# Altium PCB GY-G11.PCBDOC (part 4 of 7)
Units mm, origin at the board's own origin, x right, y up, seen from the top; angles counter-clockwise.
Board outline 170.4 x 114.15 mm, 2 copper layers (Top Layer, Bottom Layer); 364 components, 260 nets, 1285 pads, 753 vias.
Unrouted connection lines stored in the file: 2.
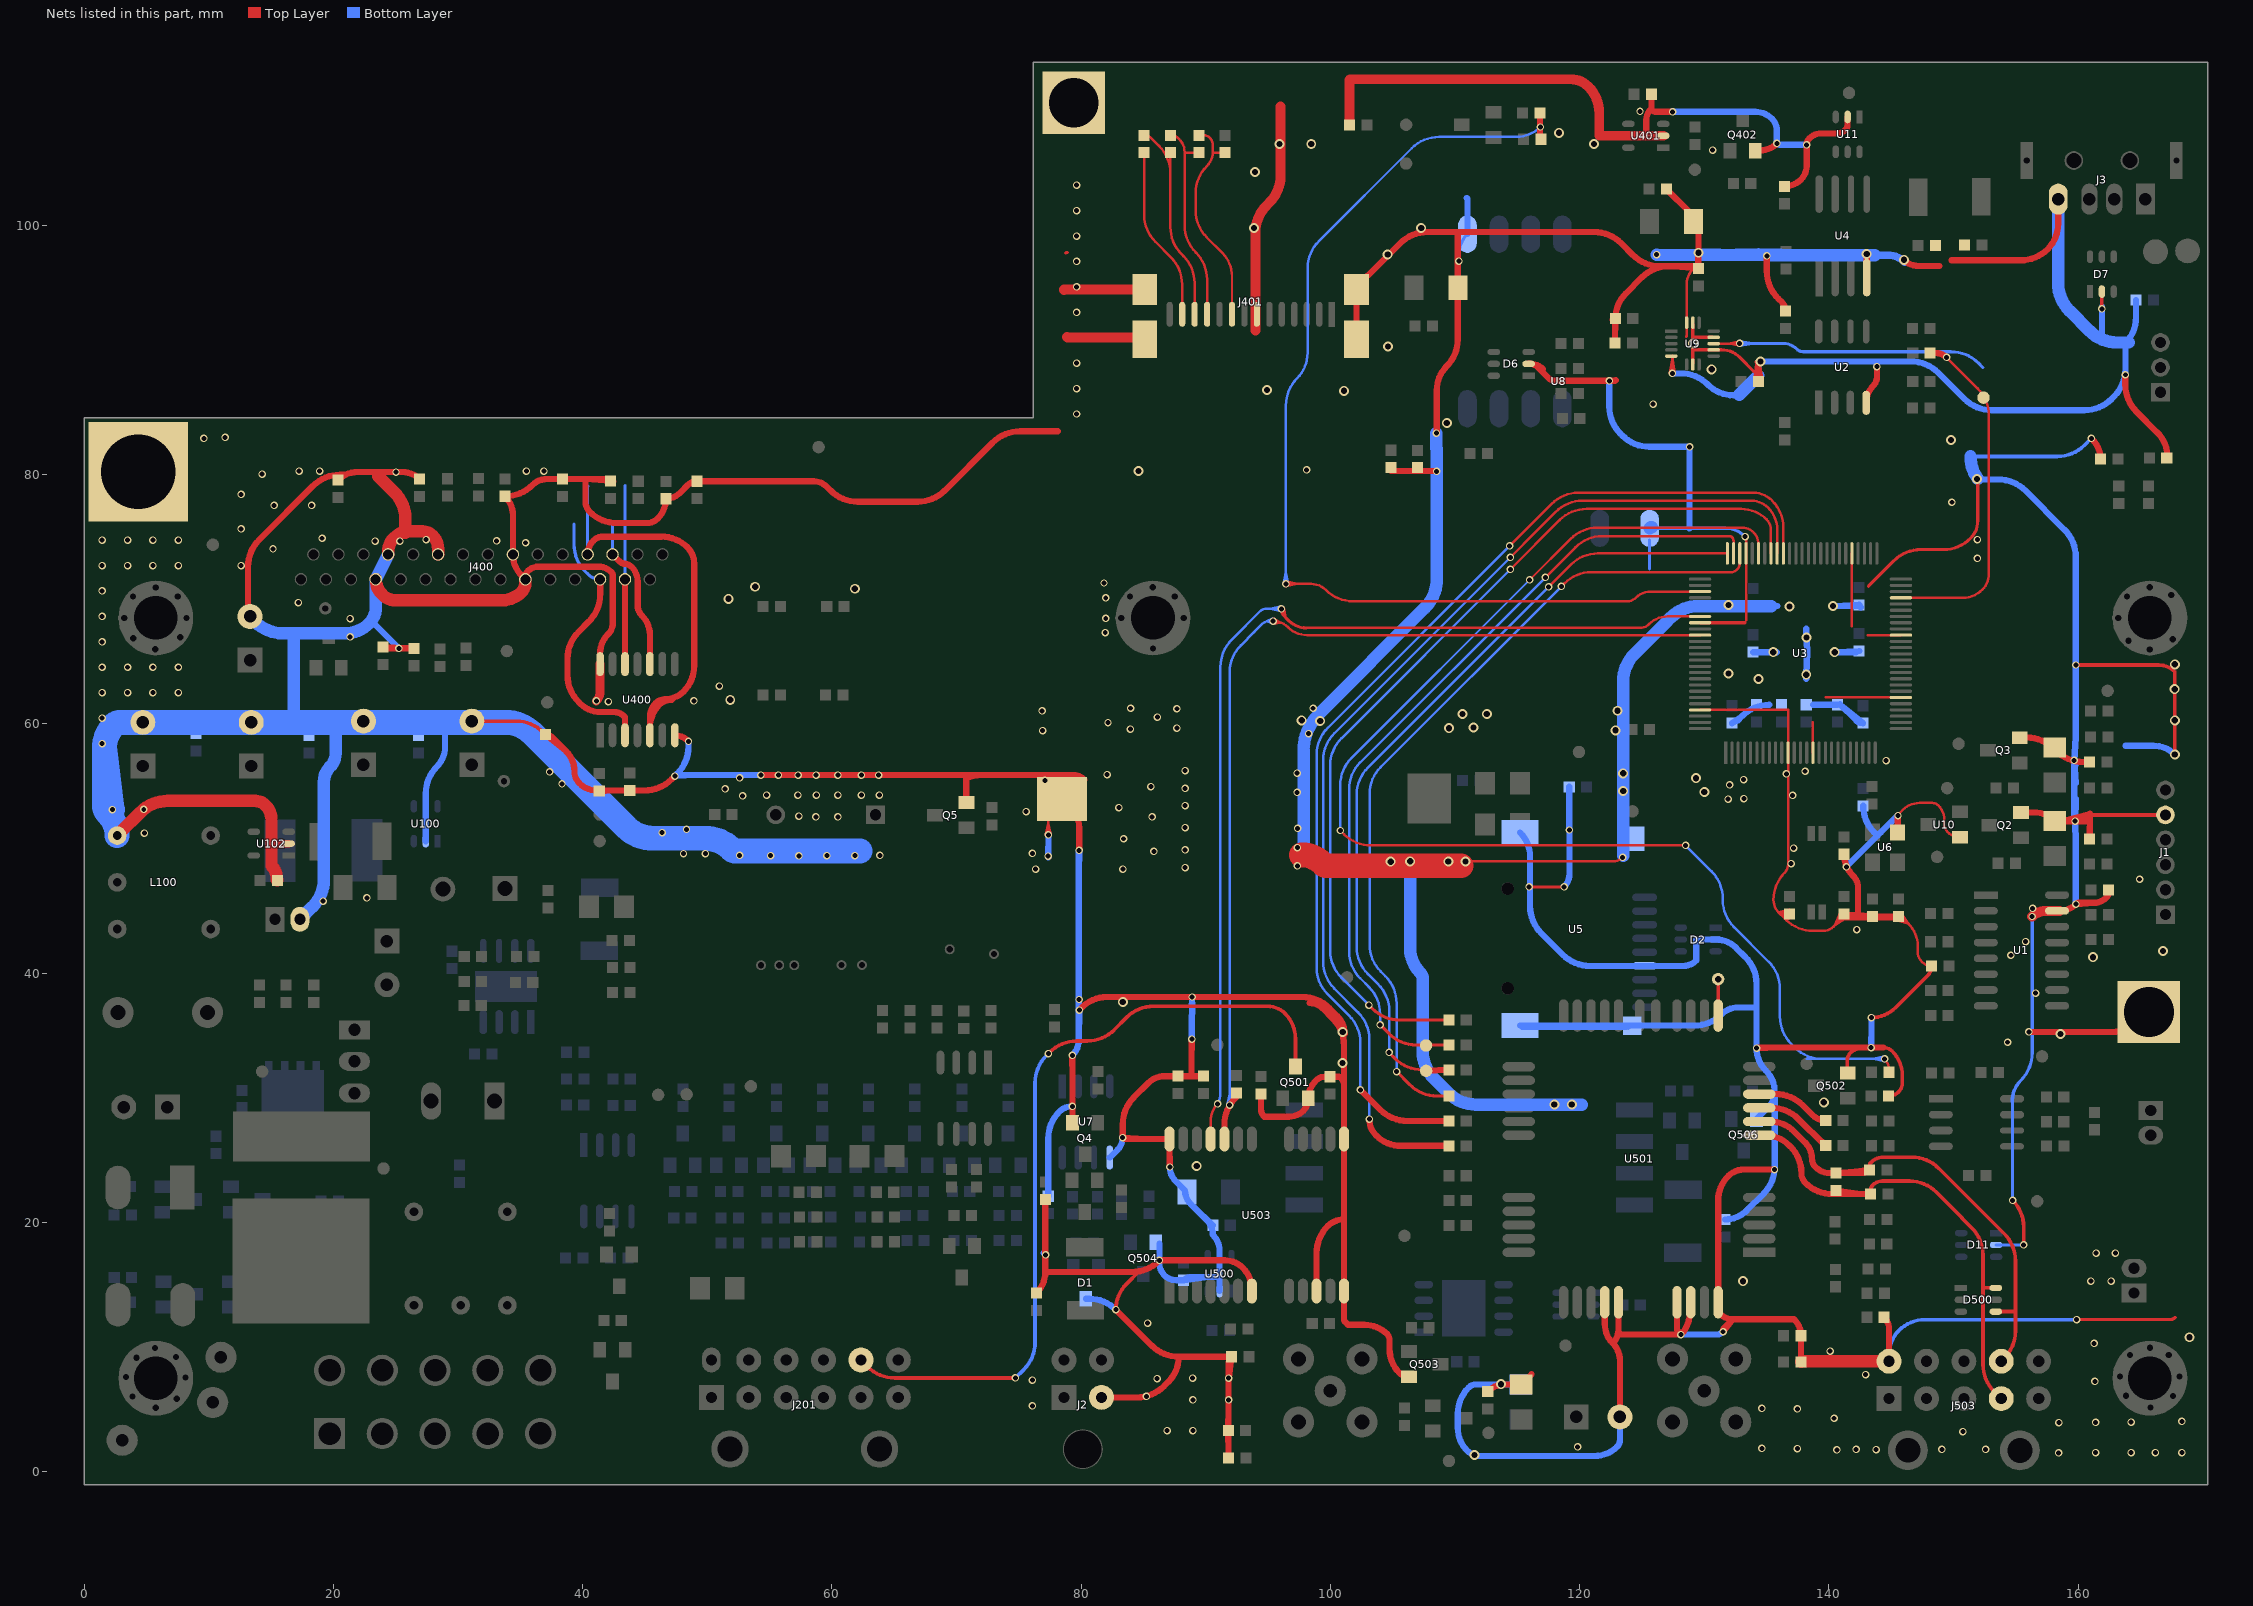
[diagram p4: the nets of this part, all layers, seen from the top]

## Via types
v1: diameter 0.6, hole 0.4, Top Layer to Bottom Layer, 620 vias
v2: diameter 0.8, hole 0.5, Top Layer to Bottom Layer, 121 vias
v3: diameter 1, hole 0.5, Top Layer to Bottom Layer, 10 vias
v4: diameter 1.27, hole 0.711, Top Layer to Bottom Layer, 2 vias

## Nets (pads, with @x,y where several pads share a name; then routed paths per layer and width w, separated by ;. In a path a pad name is that pad's centre, name@x,y a point inside that pad or via, vN(x,y) a via of type N, cw(c..) or ccw(c..) an arc to the next point about the centre after c; other vN are vias at no path point) (continued)
GND: BQ100.2 BT1.2 C3.2 C5.2 C6.1 C7.2 C8.2 C9.2 C10.2 C11.2 C12.1 C13.2 C14.2 C15.2 C16.2 C17.2 C18.2 C19.2 C20.2 C21.2 C22.2 C23.2 C24.2 C25.2 C26.2 C27.1 C28.1 C29.2 C30.1 C31.2 C32.2 C33.2 C107.2 C108.2 C114.2 C115.1 C118.2 C122.2 C124.2 C400.2 C401.1 C402.1 C403.1 C404.2 C405.2 C406.1 C407.1 C408.1 C409.1 C410.1 C411.1 C412.1 C413.2 C417.2 C418.2 C500.2 C501.2 C502.2 C503.2 C504.2 C505.2 C506.1 C507.2 C524.2 D1.3 D2.2 D4.1 D5.1 D6.2 D7.2 D11.2 D503.1 D504.1 J1.5 J2.3 J3.4 J400.12 J400.13 J400.19 J400.23 J400.24 J401.0 J401.7 J503.2 L7.2 L100.4 L500.2 L501.2 L502.2 L503.2 L504.1 pad.0@4.339,80.24 pad.0@79.4,109.84 pad.0@85.101,90.87 pad.0@102.101,90.87 pad.0@165.67,36.89 Q2.2 Q3.2 Q4.2 Q5.2 Q402.2 Q501.2 Q502.2 Q503.2 Q504.2 Q506.2 R4.1 R5.1 R22.2 R23.2 R28.2 R102.2 R400.1 R411.2 R412.2 R501.1 R503.1 R522.1 U1.15 U2.4 U3.11 U3.15 U3.31 U3.41 U3.55 U3.72 U3.83 U3.97 U4.4 U5.6 U5.10 U6.2 U7.5 U8.8 U8.10 U9.5 U9.7 U9.10 U9.12 U9.15 U9.16 U10.1 U11.2 U100.2 U102.2 U400.7 U400.14 U401.2 U500.2 U501.35 U501.36 U501.37 U501.38 U501.40 U503.7 U503.10 U503.12 U503.13 U503.24 | length 1703.7
  Top Layer w0.2: v1@77.171,51.122 77.37,52 v1@77.569,51.122 ; v1(77.37,51.1) 77.37,52.392 cw(c77.848,52.392) BT1.2@77.51,52.73 ; 97.5,49.49 98.723,49.49 cw(c98.723,47.373) 100.22,48.87 cw(c100.461,48.629) 100.461,48.97 122.677,48.97 ccw(c122.677,50.063) v1(123.45,49.29) ; 128.55,91.08 ccw(c128.496,91.134) 128.572,91.134 128.572,95.273 cw(c130.237,95.273) 129.06,96.45 cw(c129.274,96.236) C17.2@129.274,96.539 ; U3.97@129.656,61.124 136.716,61.124 136.716,48.704 cw(c135.802,48.704) 136.448,48.058 ccw(c138.616,45.89) 135.55,45.89 ccw(c136.974,45.89) 135.967,44.883 ; v1(133.273,75.039) cw(c133.096,74.862) 133.346,74.862 133.346,68.331 ; C28.1@136.465,44.385 135.967,44.883 ; C28.1@136.484,44.805 136.562,44.288 ; C28.1@136.688,44.796 136.562,44.288 ; C28.1@136.7,44.42 135.967,44.883 ; C28.1@136.787,44.602 135.967,44.883 ; C28.1@136.81,45.086 135.967,44.883 ; C28.1@136.834,44.886 135.967,44.883 ; C28.1@136.937,44.653 136.562,44.288 ; C28.1@137.048,44.481 136.562,44.288 ; U3.15@138.716,57.694 138.716,60.146 ; 139.738,62.124 U3.31@145.776,62.124 ; C27.1@140.929,44.922 140.458,43.828 ; C27.1@141.106,44.828 140.458,43.828 ; C27.1@141.327,44.642 140.458,43.828 ; C27.1@141.452,44.485 140.458,43.828 ; 141.846,67.844 U3.55@141.846,73.684 ; 142.32,44.561 C114.2@143.478,44.561 ; 143.117,67.124 U3.41@145.776,67.124 ; C114.2@143.421,44.222 142.433,44.561 ; C114.2@143.421,44.901 142.433,44.561 ; C114.2@143.468,44.417 142.433,44.561 ; C114.2@143.468,44.705 142.433,44.561 ; C29.2@145.423,44.254 146.39,43.96 ; C29.2@145.5,44.439 146.39,43.96 ; v1(145.54,52.64) cw(c145.736,52.64) 145.597,52.779 145.919,53.1 cw(c147.271,51.748) 147.271,53.66 148.296,53.66 cw(c148.296,52.977) 148.779,53.46 cw(c147.62,52.301) 149.259,52.301 149.259,51.975 ccw(c150.188,51.975) 149.531,51.318 ccw(c150.503,52.29) U10.1@150.503,50.915 ; C29.2@145.672,44.671 146.39,43.96 ; C29.2@145.827,44.799 146.39,43.96 ; C6.1@148.242,40.578 cw(c148.242,41.662) 147.475,40.895 cw(c148.331,41.752) 147.12,41.752 147.12,42.198 ccw(c144.628,42.198) 146.39,43.96 ; 135.967,44.883 C28.1@136.822,44.742 136.562,44.288 ; 136.562,44.288 ccw(c138.73,46.456) 138.73,43.39 139.525,43.39 ccw(c139.525,44.585) 140.37,43.74 141.117,44.487 ccw(c140.862,44.742) 141.174,44.561 ccw(c140.862,44.742) C27.1@141.222,44.742 140.458,43.828 ; 146.39,43.96 C29.2@145.578,44.561 cw(c145.578,44.052) 145.938,44.412 146.39,43.96
  Top Layer w0.254: v1@48.423,58.667 v1(48.49,58.6) ; 78.75,97.78 cw(c78.895,97.635) 78.895,97.84 ; v1(115.95,46.93) v1(118.75,46.93) ; v1@127.268,88.146 127.45,89.192 ; v1(127.44,88.13) 127.45,89.192 ; v1@127.45,88.154 U9.5@127.45,89.517 ; v1@127.613,88.142 127.45,89.192 ; U9.7@129.072,88.951 129.072,90.02 ; 129.072,90.03 U9.15@129.072,92.1 ; 129.072,91.05 ccw(c129.13,91.108) 129.13,91.026 U9.12@130.648,91.026 ; 129.082,90.026 131.377,90.026 cw(c131.377,87.957) 132.84,89.42 134.025,88.235 cw(c133.267,87.478) C15.2@134.339,87.478 ; U3.83@129.656,68.124 133.26,68.124 ; C15.2@134.021,87.481 v2@134.196,88.895 ; C15.2@134.024,87.519 134.339,88.684 C15.2@134.653,87.519 ; C15.2@134.029,87.547 v2@134.448,88.695 ; v2@134.166,89.076 134.339,88.028 ; v2(134.511,89.076) 134.339,88.028 ; C15.2@134.649,87.544 v2@134.196,88.895 ; C15.2@134.656,87.49 v2@134.448,88.695 ; 143.162,71.042 145.212,73.092 cw(c147.38,70.924) 147.38,73.99 149.19,73.99 ccw(c149.19,77.056) 151.358,74.888 ccw(c149.953,76.293) 151.94,76.293 v2@151.94,79.66 ; v1(159.88,12.2) 167.34,12.2 ccw(c167.34,12.828) 167.784,12.384 ; v2@134.196,88.895 C15.2@134.339,87.478 ; C15.2@134.339,87.478 134.339,88.028 ; C15.2@134.339,87.478 v2@134.448,88.695 ; C15.2@134.339,87.478 134.339,88.028 ; 134.339,88.028 134.643,87.569 134.339,88.028 ; 134.339,88.028 134.035,87.569 134.339,88.028
  Top Layer w0.3: C124.2@31.108,60.226 34.665,60.226 cw(c34.665,57.16) 36.833,59.328 C7.2@37.022,59.139 ; v1(82.78,13) cw(c85.701,13) 83.636,15.066 84.653,16.083 ; v1(134.19,33.98) cw(c134.311,33.859) v1@134.311,34.03 ; Q502.2@141.476,32.004 141.476,33.039 cw(c142.241,33.039) 141.7,33.58 cw(c142.786,32.494) 142.786,34.03 ; v1(143.41,36.44) ccw(c143.41,39.192) 145.356,37.246 147.926,39.816 ccw(c147.165,40.578) C6.1@148.242,40.578 ; 144.38,34.03 cw(c144.38,33.04) 145.08,33.74 cw(c143.124,31.784) 145.89,31.784 145.89,31.215 cw(c144.84,31.215) 145.583,30.473 cw(c144.794,31.261) R503.1@144.794,30.146 ; v1(154.74,21.78) cw(c152.591,19.631) 155.63,19.631 v1(155.63,18.21) ; v1(159.809,64.73) 166.436,64.73 cw(c166.436,62.886) 167.74,64.19 cw(c167.716,64.166) 167.75,64.166 v2(167.75,57.539) ; 160.937,52.699 166.998,52.699 ccw(c166.998,52.702) J1.5@167,52.7 ; v1(161.896,93.31) D7.2@161.896,94.694
  Top Layer w0.5: C400.2@13.15,68.4 13.15,72.62 cw(c16.216,72.62) 14.048,74.788 18.362,79.102 cw(c20.53,76.934) 20.53,80 C401.1@20.81,80 ; C401.1@20.374,79.567 cw(c21.926,78.015) 21.926,80.21 25.571,80.21 cw(c25.571,78.343) R411.2@26.892,79.663 ; 25.934,66.067 C412.1@23.978,66.158 ; C409.1@26.474,66.067 C412.1@24.198,66.067 ; 38.656,57.824 C7.2@37.022,59.139 ; 40.22,79.658 40.22,77.868 ccw(c41.422,77.868) 40.572,77.018 ccw(c42.74,79.186) 42.74,76.12 45.163,76.12 ccw(c45.163,77.319) 46.011,76.471 ccw(c44.412,78.07) C405.2@46.674,78.07 ccw(c46.674,79.679) 47.811,78.541 48.451,79.181 cw(c49.158,78.474) R400.1@49.158,79.474 58.546,79.474 cw(c58.546,78.026) 59.57,79.05 59.892,78.728 ccw(c62.06,80.896) 62.06,77.83 66.88,77.83 ccw(c66.88,80.896) 69.048,78.728 72.884,82.564 cw(c75.095,80.353) 75.095,83.48 78.12,83.48 ; 40.252,79.658 R412.2@42.246,79.503 ; C402.1@41.326,54.633 43.271,54.661 C108.2@43.778,54.661 41.833,54.64 ; U400.14@41.394,64.808 41.394,65.641 cw(c43.599,65.641) 42.04,67.2 ccw(c41.123,68.117) 42.42,68.117 42.42,71.9 ccw(c42.01,71.9) 42.3,72.19 ccw(c41.262,71.152) 41.262,72.62 36.459,72.62 ccw(c36.459,71.391) 35.59,72.26 ccw(c36.049,71.801) 35.4,71.801 35.4,71.6 35.107,71.893 cw(c36.814,73.6) 34.4,73.6 34.4,76.758 ccw(c32.261,76.758) C404.2@33.774,78.27 33.8,78.27 ccw(c33.8,81.336) 35.968,79.168 cw(c37.152,77.985) 37.152,79.658 41.981,79.658 cw(c41.981,78.981) 42.46,79.46 ccw(c42.356,79.356) R412.2@42.356,79.503 ; v1(47.39,55.82) 47.129,55.559 cw(c44.961,57.727) 44.961,54.661 41.119,54.661 cw(c41.119,56.617) 39.736,55.234 cw(c40.692,56.19) 39.34,56.19 ccw(c37.046,56.19) 38.668,57.812 37.567,58.913 ; U400.7@47.394,59.093 cw(c47.394,57.637) v1@48.423,58.667 ; v1(54.3,55.9) 79.357,55.9 cw(c79.357,54.637) BT1.2@80.25,55.53 ; Q5.2@70.776,53.704 70.776,55.662 cw(c71.96,52.834) 71.96,55.9 ; C10.2@76.422,14.339 ccw(c74.732,16.029) 77.122,16.029 ; 77.122,19.2 v1(77.14,17.4) 77.122,16.029 ; C411.1@77.122,21.842 77.122,16.029 ; BT1.2@79.2,53.24 cw(c77.655,51.695) 79.84,51.695 v1(79.84,49.86) ; v1(79.29,33.4) 79.296,31.6 ; Q4.2@79.296,27.976 v1@79.296,33.4 ; v1(79.846,37.038) 80.09,37.282 ; 80.087,37.279 cw(c82.032,35.332) 80.43,37.57 cw(c82.032,35.332) 82.032,38.085 ; J2.3@81.627,5.964 84.474,5.964 ccw(c84.474,9.03) 86.642,6.862 86.997,7.217 ccw(c84.991,9.222) 87.828,9.222 ; 81.825,38.09 97.75,38.09 cw(c97.75,35.024) 99.918,37.192 100.553,36.557 cw(c99.136,35.14) v2@101.14,35.14 ; v1(82.78,13) 85.66,10.12 ccw(c87.828,12.288) 87.828,9.222 ; 85.148,26.694 v1(83.33,26.81) ; U503.24@87.09,26.251 v1(87.11,24.45) cw(c87.158,24.498) 87.09,24.498 U503.24@87.09,26.694 83.609,26.694 cw(c83.609,27.089) v1(83.33,26.81) ; 88.86,31.739 v1@88.86,34.662 ; 88.86,32.909 v1(88.88,34.71) ; C501.2@89.722,31.739 C506.1@87.778,31.758 86.705,31.739 ; C501.2@89.822,31.739 86.705,31.739 ; L502.2@91.823,1.101 91.823,8.647 ; L502.2@91.823,1.355 L503.2@91.803,3.3 91.823,5.245 ; v1@91.823,7.224 C502.2@92.061,9.222 ; U503.7@93.69,14.494 93.69,14.608 ccw(c91.198,14.608) 92.96,16.37 ccw(c91.536,14.946) 91.536,16.96 v1(86.28,16.96) 86.247,16.927 cw(c84.079,19.095) 84.653,16.083 cw(c84.079,19.095) 84.079,16.029 77.122,16.029 ; R501.1@94.436,30.322 94.436,29.065 ccw(c95.235,29.065) 94.67,28.5 ccw(c94.694,28.524) 94.694,28.49 96.671,28.49 ccw(c96.671,30.129) 97.83,28.97 ccw(c96.922,29.878) 98.206,29.878 cw(c100.35,29.878) 98.834,31.394 cw(c99.558,30.67) 99.558,31.694 100.613,31.694 ; 98.319,37.61 cw(c98.319,36.113) 99.377,37.172 100.192,36.357 cw(c98.024,34.189) 101.09,34.189 101.09,12.232 ccw(c101.386,12.232) 101.177,12.022 101.41,11.789 102.74,11.789 cw(c102.74,9.232) 104.549,11.04 cw(c104.09,10.581) 104.739,10.581 104.739,9.49 ; U503.10@98.89,14.494 98.89,17.55 cw(c101.956,17.55) 99.788,19.718 cw(c101.048,18.458) 101.048,20.24 101.09,20.24 ; R522.1@99.954,31.694 100.613,31.694 ; 101.09,30.996 ccw(c100.236,30.996) 100.84,31.6 ccw(c100.613,31.373) 100.613,31.694 ; pad.0@102.101,90.87 102.101,93.81 cw(c105.167,93.81) 102.999,95.978 104.634,97.614 105.593,98.572 cw(c107.761,96.404) 107.761,99.47 121.16,99.47 cw(c121.16,96.404) 123.328,98.572 124.272,97.628 ccw(c126.44,99.796) 126.44,96.73 129.522,96.73 129.45,97.94 C17.2@129.522,96.539 ; 104.74,9.85 ccw(c107.468,9.85) 105.539,7.921 ccw(c106.324,8.706) Q503.2@106.324,7.596 ; C31.2@104.874,80.289 v1@108.474,80.289 ; v1(108.501,83.33) ccw(c108.428,83.403) 108.531,83.403 108.531,86.783 cw(c111.227,86.783) 109.32,88.69 ccw(c107.152,90.858) 110.218,90.858 110.218,99.162 ccw(c109.782,99.162) 110.091,99.47 ; v1@110.218,96.908 cw(c110.533,96.908) v1(110.311,97.13) ; C503.2@112.622,6.439 cw(c113.977,5.084) 113.977,7 D503.1@115.322,7 116.142,7.82 ; D6.2@115.906,88.896 116.032,88.896 cw(c116.032,87.442) 117.06,88.47 ; D6.2@115.998,88.896 cw(c115.998,87.988) 116.64,88.63 117.567,87.703 ccw(c117.96,88.095) 117.96,87.54 120.646,87.54 cw(c120.646,87.506) 120.67,87.53 122.779,87.53 ccw(c122.779,87.701) 122.9,87.58 ; U501.35@122.01,13.598 122.01,11.869 ccw(c124.229,11.869) 122.66,10.3 ; C20.2@122.645,92.433 ccw(c122.645,92.739) 122.842,92.504 ccw(c122.645,92.739) C20.2@122.861,92.522 ; 122.842,91.27 C12.1@122.842,90.578 ; C20.2@122.842,92.522 C12.1@122.842,90.578 ; U501.36@123.11,13.598 123.11,11.386 cw(c121.574,11.386) 122.66,10.3 ; 123.19,11.11 ccw(c123.456,11.376) 123.456,11 v1(128.11,11) ; C500.2@123.226,4.392 123.226,8.933 ccw(c121.293,8.933) 122.66,10.3 ; 125.34,107.196 125.34,108.465 cw(c126.535,108.465) 125.69,109.31 ; C408.1@125.767,110.526 125.767,109.496 cw(c125.504,109.496) 125.69,109.31 ; C407.1@126.958,102.922 128.814,101.067 cw(c128.08,100.333) C417.2@129.118,100.333 cw(c128.141,99.356) 129.522,99.356 C17.2@129.522,96.539 ; 127.159,96.73 ccw(c127.159,93.664) 124.991,95.832 123.696,94.537 ccw(c125.71,92.522) C20.2@122.861,92.522 ; v1(127.46,109.12) 126.149,109.12 cw(c126.149,109.769) 125.69,109.31 ; 127.544,96.73 C17.2@129.522,96.539 ; U501.37@127.81,13.598 127.81,11.514 ccw(c128.254,11.514) v1@127.94,11.2 ; v1@128.139,10.975 ccw(c125.794,12.95) 128.86,12.95 U501.38@128.86,13.39 ; 129.522,98.483 C17.2@129.522,96.539 ; U501.40@131.25,12.67 ccw(c132.288,13.708) U501.40@131.335,12.591 ; Q402.2@134.104,106.024 134.478,106.024 ccw(c134.478,107.922) v1(135.82,106.58) ; v1(134.19,33.98) 135.996,34.03 ; v1@134.311,34.03 144.38,34.03 ; v1(135.01,97.55) 135.01,96.345 ccw(c138.137,96.345) 135.926,94.134 136.24,93.82 cw(c135.559,93.139) C19.2@136.522,93.139 ; v1(135.63,24.24) 133.161,24.24 ccw(c133.161,22.499) 131.93,23.73 ccw(c133.91,21.75) 131.11,21.75 U501.40@131.11,13.598 ccw(c133.47,13.598) U501.40@131.335,12.591 ; C18.2@136.422,103.139 ccw(c136.422,105.037) 137.765,103.695 ccw(c136.689,104.77) 138.21,104.77 v1(138.21,106.47) cw(c138.934,106.47) 138.422,106.982 cw(c139.383,106.022) 139.383,107.38 140.648,107.38 ccw(c140.648,108.302) 141.3,107.65 ccw(c140.824,108.126) 141.497,108.126 U11.2@141.497,108.706 ; L500.2@137.763,8.808 L501.2@137.763,10.908 ; L500.2@137.763,8.964 L501.2@137.763,10.908 ; C27.1@141.222,44.48 C29.2@145.381,44.48 ; C27.1@141.222,44.742 C114.2@143.225,44.48 ; C30.1@141.222,49.542 ccw(c143.647,49.542) 141.932,47.828 cw(c140.949,46.844) 142.34,46.844 142.34,44.61 cw(c142.272,44.61) 142.32,44.561 ; C27.1@141.515,44.703 C114.2@143.478,44.561 ; C27.1@141.528,44.48 C114.2@143.478,44.561 ; U2.4@142.991,85.772 cw(c144.922,85.772) 143.557,87.137 ccw(c142.849,87.845) 143.85,87.845 v1(143.85,88.68) ; v2(143.03,97.71) cw(c143.024,97.704) 143.032,97.704 U4.4@143.032,95.814 ; C114.2@143.623,44.48 C29.2@145.578,44.561 cw(c145.381,44.758) C29.2@145.381,44.48 ; L504.1@144.434,12.392 cw(c143.485,11.443) 144.827,11.443 J503.2@144.827,8.864 cw(c144.692,8.999) J503.2@144.692,8.808 ; C29.2@145.431,44.555 C114.2@143.478,44.561 ; v2(146.02,97.238) ccw(c147.199,98.418) 147.199,96.75 148.86,96.75 ; 149.83,97.2 155.38,97.2 ccw(c155.38,100.266) 157.548,98.098 ccw(c155.496,100.151) 158.398,100.151 J3.4@158.398,102.11 ; Q3.2@155.276,58.904 155.886,58.904 cw(c155.886,55.838) 158.054,58.006 158.208,57.852 ccw(c160.376,60.02) 160.376,56.954 R5.1@160.906,56.954 ; Q2.2@155.376,52.904 156.42,52.904 cw(c156.42,50.498) D4.1@158.122,52.2 160.768,52.2 ; v1(156.04,35.289) 162.734,35.289 ccw(c162.734,38.416) 164.945,36.205 pad.0@165.47,36.73 ; U1.15@158.3,44.999 158.505,44.999 ccw(c158.505,46.845) v1(159.81,45.54) ; D4.1@158.769,52.2 160.937,52.792 ; 160.89,52.25 cw(c160.768,52.372) 160.768,52.2 ; R4.1@160.907,50.848 160.937,52.792 ; 160.937,52.699 R4.1@160.906,50.754 ccw(c160.831,50.829) 160.937,50.829 160.937,52.792 ; v1(161.05,82.92) 161.142,82.828 cw(c159.559,81.246) R22.2@161.797,81.246 ; C5.2@162.439,46.678 162.439,46.516 cw(c161.794,46.516) 162.25,46.06 cw(c161.26,47.05) 161.26,45.65 ; v1@163.78,87.996 163.78,87.23 ccw(c166.846,87.23) 164.678,85.062 166.32,83.42 cw(c164.221,81.32) R23.2@167.19,81.32 ; C412.1@23.978,66.158 ccw(c24.198,66.378) C412.1@24.198,66.067 ; C412.1@23.978,66.158 v1(25.25,66.067) C412.1@24.198,66.067 ; C7.2@37.022,59.139 cw(c37.022,58.369) 37.567,58.913 ; C7.2@37.022,59.139 37.567,58.913 ; v1(83.33,26.81) 83.33,27.87 cw(c86.396,27.87) 84.228,30.038 85.38,31.19 cw(c86.705,29.865) 86.705,31.739 ; 87.828,9.222 C502.2@92.061,9.222 ; 91.823,8.647 cw(c92.637,8.647) C502.2@92.061,9.222 ; 91.823,8.647 C502.2@92.061,9.222 ; C12.1@122.842,90.578 C20.2@122.861,92.522 ; U501.40@131.335,12.591 ccw(c132.288,13.708) 132.288,12.24 ; v1(131.5,11.23) cw(c132.036,11.23) 131.657,11.609 ; v1(131.5,11.23) 131.657,11.609 ; v1(131.5,11.23) 132.288,12.24 ; 131.657,11.609 132.288,12.24 ; 132.288,12.24 137.138,12.24 cw(c137.138,12.115) 137.227,12.203 cw(c135.931,10.908) L501.2@137.763,10.908 ; C114.2@143.478,44.561 C29.2@145.381,44.48 ; v1(159.81,45.54) cw(c160.076,45.274) 160.076,45.65 161.26,45.65 ; v1(159.81,45.54) 161.26,45.65 ; 160.768,52.2 160.937,52.792 ; U6.2@145.513,51.293 v1(145.54,52.64) ccw(c145.606,52.574) 145.513,52.574 U6.2@145.513,51.293
  Top Layer w0.6: 15.03,50.4 16.396,50.4 cw(c16.396,50.386) U102.2@16.406,50.396
  Top Layer w0.7: v1(41.089,61.845) ccw(c40.352,62.582) 41.394,62.582 U400.14@41.394,64.808
  Top Layer w0.8: 78.621,94.83 cw(c78.717,94.734) 78.717,94.87 J401.0@85.101,94.87 ; 78.851,91.05 ccw(c78.971,91.171) 78.971,91 pad.0@84.761,91 ; 93.981,91.572 93.981,99.439 cw(c97.047,99.439) 94.879,101.607 95.102,101.83 ccw(c92.934,103.998) 96,103.998 96,109.538 ; C406.1@101.533,108.044 101.533,111.665 ; 101.561,111.73 119.289,111.73 cw(c119.289,109.75) 120.689,111.15 cw(c118.564,109.025) 121.569,109.025 121.569,107.196 U401.2@126.706,107.196 ; v1(156.31,44.55) cw(c157.395,43.465) 157.395,44.999 U1.15@158.505,44.999
  Top Layer w1: v1(4.78,53.14) L100.4@2.648,51.044 4.537,52.932 cw(c6.705,50.764) 6.705,53.83 13.719,53.83 cw(c13.719,52.669) 14.54,53.49 cw(c13.357,52.307) 15.03,52.307 15.03,48.705 ccw(c15.235,48.705) 15.09,48.56 cw(c14.269,47.739) 15.43,47.739 15.43,47.63 ccw(c15.679,47.63) R102.2@15.503,47.454 ; J400.24@23.4,71.6 ccw(c25.114,71.6) 23.902,70.388 ccw(c25.008,71.494) 25.008,69.93 33.521,69.93 ccw(c33.521,72.149) 35.09,70.58 ccw(c34.342,71.328) 35.4,71.328 J400.12@35.4,71.6 ; 23.61,79.87 24.872,78.608 cw(c22.704,76.44) 25.77,76.44 25.77,75.35 ; J400.23@24.4,73.6 24.4,73.805 cw(c26.005,73.805) 24.87,74.94 cw(c26.101,73.709) 25.77,75.418 cw(c26.101,73.709) 26.101,75.45 27.139,75.45 cw(c27.139,74.289) 27.96,75.11 cw(c26.898,74.048) 28.4,74.048 J400.19@28.4,73.6 ; L500.2@137.763,8.808 141.212,8.864 ; L500.2@137.898,8.864 J503.2@144.827,8.864
  Top Layer w2: 97.69,49.49 cw(c97.69,47.1) 99.38,48.79 ccw(c99.79,49.2) 99.79,48.62 110.47,48.62
  Bottom Layer w0.254: v1(110.311,97.13) 110.311,97.665 cw(c112.632,97.665) U8.8@110.99,99.306 ; U5.10@115.33,35.55 123.641,35.55 ccw(c123.641,36.359) U5.10@124.213,35.787 ; 125.6,72.42 125.6,74.736 cw(c125.634,74.736) U8.10@125.61,74.76 ; U8.10@125.61,75.698 131.681,75.698 cw(c131.681,73.448) v1(133.273,75.039) ; D11.2@153.412,18.193 155.589,18.193 ccw(c155.589,18.251) v1(155.63,18.21) ; 154.68,29.67 cw(c157.118,29.67) 155.394,31.394 ; v1(154.74,21.78) 154.74,29.815 cw(c156.973,29.815) 155.394,31.394 ; v1(156.31,44.55) 156.31,33.605 cw(c153.183,33.605) 155.394,31.394 ; 159.77,53.71 ccw(c159.673,53.807) 159.81,53.807 159.81,55.244
  Bottom Layer w0.3: J503.2@144.827,8.864 144.827,9.44 cw(c147.5,9.44) 145.61,11.33 cw(c147.71,9.23) 147.71,12.2 v1(159.88,12.2) ; 151.359,81.469 158.329,81.469 ccw(c158.329,84.535) 160.497,82.367 v1(161.05,82.92)
  Bottom Layer w0.5: 23.09,68.1 cw(c23.09,67.793) 23.307,68.01 v1(25.25,66.067) 23.889,67.428 ; U100.2@27.404,50.594 27.404,54.414 cw(c30.47,54.414) 28.302,56.582 ccw(c26.714,58.17) 28.96,58.17 28.96,59.69 ; 40.346,53.956 cw(c40.38,53.922) 40.38,53.97 ; v1(47.39,55.82) cw(c47.583,55.627) 47.583,55.9 v1(54.3,55.9) ; v1(48.49,58.6) 48.49,58.19 cw(c45.424,58.19) 47.592,56.022 v1(47.39,55.82) 49.215,55.9 ; v1@76.988,17.552 v1(77.14,17.4) ; R28.2@77.354,22.103 77.354,26.734 cw(c80.42,26.734) 78.252,28.902 cw(c79.261,27.893) 79.261,29.32 v1(79.3,29.32) ; v1@77.354,49.3 v1(77.37,51.1) ccw(c77.408,51.062) v1@77.354,51.062 ; v1(79.29,33.4) ccw(c78.035,34.655) 79.81,34.655 79.81,49.788 cw(c79.912,49.788) v1(79.84,49.86) 79.81,48.058 ; 79.81,34.76 v1(79.846,37.038) ; D1.3@80.378,13.881 80.654,13.881 cw(c80.654,10.874) v1(82.78,13) ; U7.5@82.291,25.208 82.932,25.849 ccw(c81.971,26.81) v1(83.33,26.81) ; v1(86.28,16.96) 86.28,18.32 86.28,16.712 ccw(c87.612,16.712) 86.67,15.77 ccw(c87.657,16.757) 87.657,15.361 C505.2@88.222,15.361 ; v1(87.11,24.45) ccw(c88.728,24.45) 87.584,23.306 88.34,22.55 ccw(c89.861,22.55) 88.785,21.475 90.089,20.171 ; v1(88.88,34.71) v1(88.9,38.09) ; 88.88,35.778 88.91,37.58 ccw(c88.982,37.508) 88.88,37.508 ; 89.026,21.234 C504.2@90.561,19.778 90.089,20.171 ; 90.218,15.62 C505.2@88.222,15.361 ; 90.561,19.031 ccw(c88.949,19.031) 90.089,20.171 ; 90.57,19.01 cw(c89.281,17.721) 91.104,17.721 U500.2@91.104,14.494 ; 91.104,15.62 88.847,15.62 ; 110.94,102.2 cw(c110.818,102.078) 110.99,102.078 U8.8@110.99,99.306 ; U5.10@115.213,35.797 129.207,35.797 ccw(c129.207,38.863) 131.375,36.695 cw(c132.715,35.355) 132.715,37.25 134.19,37.25 ; U5.10@115.213,51.287 cw(c113.264,49.338) 116.02,49.338 116.02,45.38 ccw(c119.086,45.38) 116.918,43.212 118.645,41.485 ccw(c120.813,43.653) 120.813,40.587 128.319,40.587 ccw(c128.319,42.031) 129.34,41.01 ccw(c129.292,41.058) 129.36,41.058 129.36,42.704 D2.2@130.793,42.704 ; D504.1@115.267,7.001 111.671,7.001 ccw(c111.671,6.179) 111.09,6.76 ccw(c113.19,4.66) 110.22,4.66 110.22,3.487 ccw(c112.747,3.487) 110.96,1.7 ccw(c112.022,2.762) 112.022,1.26 121.185,1.26 ccw(c121.185,3.855) 123.02,2.02 ccw(c122.522,2.518) 123.226,2.518 C500.2@123.226,4.392 ; v1(118.75,46.93) ccw(c117.712,47.968) 119.18,47.968 v1(119.18,51.49) cw(c119.228,51.538) 119.16,51.538 C16.2@119.16,54.955 ; v1(122.38,87.53) 122.38,85.45 ccw(c125.446,85.45) 123.278,83.282 123.422,83.138 ccw(c125.59,85.306) 125.59,82.24 v1(128.82,82.24) 128.82,75.77 cw(c128.718,75.77) 128.79,75.698 ; v1(127.44,88.13) 128.11,88.13 cw(c128.11,85.064) 130.278,87.232 ccw(c132.359,89.313) 132.359,86.37 ccw(c132.359,88.618) 132.791,86.412 ; v1(127.46,109.12) 134.078,109.12 cw(c134.078,107.208) 135.43,108.56 cw(c134.488,107.618) 135.82,107.618 v1(135.82,106.58) ccw(c136.086,106.846) 136.086,106.47 v1(138.21,106.47) ; v1(128.11,11) 130.945,11 ccw(c130.945,11.785) v1(131.5,11.23) ; v2@129.45,97.94 131.251,97.92 ; D2.2@130.906,42.704 cw(c130.906,40.338) 132.348,42.213 cw(c130.906,40.338) 132.579,42.011 133.292,41.298 cw(c131.124,39.13) 134.19,39.13 v1(134.19,33.98) ccw(c136.725,33.98) 134.932,32.188 cw(c133.2,30.455) 135.65,30.455 ; C524.2@131.665,20.24 ccw(c131.665,22.713) 133.414,20.964 134.752,22.302 ccw(c132.584,24.47) 135.65,24.47 135.65,30.455 ; C22.2@132.222,60.061 133.041,60.641 ; 132.55,97.92 134.35,97.93 136.15,97.92 ; C22.2@132.63,60.23 133.041,60.641 ; C14.2@133.922,65.761 v2@135.82,65.761 ; C13.2@133.922,69.461 135.867,69.461 ; Q506.2@134.193,28.307 135.161,29.276 ccw(c133.982,30.455) 135.65,30.455 ; 134.339,87.971 134.339,89.09 143.84,89.09 v1@143.84,88.704 ; 135.209,61.539 ccw(c135.209,58.473) 133.041,60.641 ; 135.37,69.461 135.79,69.461 ; 138.178,67.569 138.25,65.761 v2(138.178,63.954) 138.178,63.62 138.236,65.42 ; 138.178,67.64 138.247,65.841 ; 138.733,61.539 C3.2@140.678,61.539 ; v2(140.32,69.461) 142.33,69.461 cw(c142.33,69.15) C26.2@142.55,69.37 ; v2@140.41,65.761 C25.2@142.181,65.761 ; v2(140.457,65.761) C25.2@142.422,65.861 ; v2@140.465,69.461 C26.2@142.422,69.561 ; C3.2@140.88,61.59 142.187,60.283 ; C3.2@141.086,61.384 C24.2@142.722,60.061 ; v1(141.4,48.53) 145.489,52.619 cw(c145.54,52.568) v1(145.54,52.64) 144.165,51.295 ; C33.2@142.745,53.43 ccw(c145.737,53.43) 143.622,51.314 143.861,51.075 ccw(c143.92,51.134) 143.92,51.05 ; 143.41,35.832 v1(143.38,34.03) ccw(c143.308,34.102) 143.41,34.102 v1(143.41,36.44) ; 143.85,89.09 146.565,89.09 cw(c146.565,85.963) 148.776,88.174 150.854,86.096 ccw(c153.065,88.307) 153.065,85.18 160.51,85.18 ccw(c160.51,88.246) 162.678,86.078 162.892,86.292 ccw(c160.724,88.46) 163.79,88.46 163.79,90.56 ccw(c161.745,92.605) 163.836,90.607 ; v2@152.16,79.62 153.575,79.62 cw(c153.575,76.493) 155.786,78.704 158.894,75.596 cw(c156.683,73.385) 159.81,73.385 159.81,58.896 v1(159.68,57.07) ; v1(159.81,45.54) 159.81,50.396 v1(159.76,52.2) ; 159.81,54.004 v1(159.76,52.2) ; 159.81,55.244 v1(159.68,57.07) ; 159.81,56.756 ccw(c159.366,56.756) v1(159.68,57.07) ; 161.87,90.96 ccw(c161.788,91.042) 161.904,91.042 v1@161.904,93.494 ; 163.8,58.25 166.033,58.25 cw(c166.033,55.822) v2(167.75,57.539) ; 163.842,90.614 ccw(c161.745,92.605) 164.637,92.605 L7.2@164.637,94.008 ; C505.2@88.222,15.361 cw(c88.847,14.737) 88.847,15.62 ; C505.2@88.222,15.361 88.847,15.62 ; 142.187,60.283 ccw(c142.722,60.819) C24.2@142.722,60.061 ; 142.187,60.283 C24.2@142.722,60.061 ; v1(159.68,57.07) 159.68,52.393 ccw(c159.953,52.393) v1(159.76,52.2)
  Bottom Layer w0.6: 143.69,97.618 144.714,97.618 cw(c144.714,95.672) v2@146.09,97.048
  Bottom Layer w1: C400.2@13.308,68.626 13.756,68.178 ccw(c15.924,70.346) 15.924,67.28 20.949,67.28 ccw(c20.949,70.011) 22.88,68.08 ccw(c21.625,69.335) 23.4,69.335 23.4,71.6 J400.23@24.4,73.6 ; 16.63,60.44 ccw(c16.22,60.85) 16.8,60.85 16.8,67.28 ; BQ100.2@17.311,44.321 18.332,45.343 ccw(c16.164,47.511) 19.23,47.511 19.23,55.367 cw(c20.903,55.367) 19.72,56.55 ccw(c18.609,57.661) 20.18,57.661 20.18,59.71 ; 97.838,57.859 cw(c101.875,57.859) 99.02,60.713 ; 97.85,50.08 97.85,57.859 ; 99.11,60.85 107.466,69.206 107.622,69.362 ccw(c105.454,71.53) 107.624,69.364 ccw(c105.454,71.53) 108.49,71.104 ccw(c105.454,71.53) 108.52,71.53 108.52,82.063 ccw(c108.383,82.063) 108.5,82.135 ; v2(106.4,48.98) 106.4,41.963 ccw(c109.063,41.963) 107.18,40.08 cw(c106.649,39.549) 107.4,39.549 107.4,33.73 ccw(c110.466,33.73) 108.298,31.562 109.502,30.358 ccw(c111.67,32.526) 111.67,29.46 120.15,29.46 ; 108.48,82.16 cw(c108.383,82.063) 108.5,82.135 ; v1(108.501,83.33) 108.5,82.16 108.5,82.135 ; v1@123.48,49.44 ccw(c123.456,49.464) 123.49,49.464 123.49,63.44 cw(c126.556,63.44) 124.388,65.608 126.829,68.049 127.343,68.563 cw(c129.511,66.395) 129.511,69.461 135.37,69.461 ; U8.10@125.61,75.706 cw(c125.79,75.526) U8.10@125.79,75.78 ; v1(126.171,97.65) 135.01,97.607 143.69,97.618 ; 132.791,86.412 134.339,87.96 ; 151.359,81.469 ccw(c154.397,81.469) v2@151.956,79.66 ; J3.4@158.398,102.11 158.398,95.332 ccw(c161.464,95.332) 159.296,93.164 160.955,91.505 ccw(c163.123,93.673) 163.123,90.607 164.043,90.607
  Bottom Layer w2: L100.4@2.648,51.044 ccw(c0.215,51.044) 1.936,52.764 cw(c2.674,53.502) 1.63,53.502 ; 62.259,49.81 52.251,49.81 cw(c52.251,50.226) 51.957,49.932 ccw(c49.789,47.764) 49.789,50.83 45.639,50.83 cw(c45.639,53.896) 43.471,51.728 35.967,59.232 ccw(c33.799,57.064) 33.799,60.13 2.883,60.13 ccw(c2.883,59.447) 2.4,59.93 ccw(c4.259,58.071) 1.63,58.071 ; 1.63,53.502 1.63,58.071 ; 1.63,53.502 v1(2.26,53.12) ; 1.63,53.502 v1(2.26,53.12) ; 1.63,58.071 v1(2.26,53.12) ; 1.63,58.071 v1(2.26,53.12)
  other v1: 158.43,1.52 161.4,1.539 164.24,1.539 166.19,1.539 168.31,1.539 140.63,1.75 142.18,1.79 143.79,1.77 149.06,1.789 152.58,1.789 137.46,1.86 134.62,1.87 119.84,1.99 150.75,3.22 86.9,3.289 88.97,3.289 158.45,3.94 161.4,3.96 164.24,3.98 168.31,4.039 140.42,4.289 137.46,5.05 134.61,5.08 76.09,5.29 88.97,5.76 91.823,5.76 85.23,6.039 161.34,7.24 76.089,7.35 86.1,7.46 88.94,7.5 91.823,7.51 142.94,7.789 140.089,9.68 161.28,10.289 85.339,11.92 161.01,15.289 162.65,15.289 161.44,17.539 162.99,17.539 154.339,34.46 79.839,37.89 156.589,38.4 154.589,41.44 155.79,42.539 142.23,43.49 156.339,45.21 19.18,45.789 22.69,46.039 164.93,47.539 76.339,48.36 83.339,48.36 88.339,48.48 97.349,48.62 136.96,48.789 77.339,49.39 57.339,49.41 55.089,49.43 59.589,49.43 61.839,49.44 52.589,49.45 63.839,49.46 49.839,49.59 48.089,49.6 76.089,49.61 85.839,49.77 88.339,49.89 137.16,50.039 97.349,50.08 83.41,50.789 4.83,51.24 46.37,51.289 48.33,51.539 97.359,51.63 88.339,51.68 58.71,52.539 60.48,52.539 85.7,52.539 57.339,52.6 75.589,52.97 83.02,53.289 88.339,53.44 131.91,53.97 133.18,54.01 52.839,54.22 54.76,54.289 57.27,54.289 58.75,54.289 60.48,54.289 62.37,54.289 63.8,54.289 137.089,54.27 97.319,54.51 51.42,54.789 88.339,54.83 85.589,54.97 132.03,55.11 38.339,55.2 77.089,55.47 133.16,55.54 52.589,55.68 55.7,55.9 57.28,55.9 58.74,55.9 60.48,55.9 62.37,55.9 63.74,55.9 82.089,55.94 136.589,55.99 97.329,56.06 37.339,56.16 138.089,56.205 88.339,56.25 144.589,57.05 1.44,58.43 98.24,59.23 76.91,59.46 83.95,59.58 87.67,59.67 82.15,60.11 1.44,60.47 86.11,60.55 76.87,61.05 87.68,61.22 83.97,61.26 98.619,61.26 42.064,61.8 48.92,61.85 1.44,62.51 3.48,62.51 5.52,62.51 7.56,62.51 50.96,63.039 1.44,64.55 3.48,64.55 5.52,64.55 7.56,64.55 1.44,66.59 21.339,66.98 81.93,67.32 21.339,68.45 81.97,68.48 1.44,68.63 17.179,69.73 81.97,70.12 1.44,70.67 81.83,71.31 12.589,72.7 1.44,72.71 3.48,72.71 5.52,72.71 7.56,72.71 151.91,73.289 15.15,74.039 35.42,74.539 23.339,74.67 25.339,74.67 33.089,74.69 1.44,74.75 3.48,74.75 5.52,74.75 7.56,74.75 27.44,74.789 151.91,74.789 19.089,74.9 12.589,75.65 15.24,77.539 18.25,77.539 149.87,77.789 12.589,78.43 14.27,80.039 25.02,80.21 108.52,80.27 17.25,80.289 18.9,80.289 35.49,80.289 36.89,80.289 98.09,80.38 9.6,82.91 11.31,82.99 79.63,84.87 125.9,85.668 79.63,86.91 163.79,88.02 79.63,88.95 79.63,93.03 79.63,95.07 79.63,97.11 79.63,99.15 79.63,101.19 79.63,103.23 130.66,106.039 124.839,109.16
  other v2: 111.56,1.35 113.68,7.02 168.93,10.789 133.1,15.289 89.269,24.539 117.96,29.46 119.37,29.46 139.589,29.64 100.969,32.789 158.589,35.128 100.979,35.289 83.339,37.7 161.18,41.289 166.81,41.789 104.83,48.95 109.46,48.97 110.84,48.97 129.999,54.539 123.49,54.62 129.339,55.65 123.49,56.04 122.88,59.49 109.52,59.66 111.48,59.71 99.18,60.23 97.69,60.29 167.75,60.289 110.6,60.8 112.55,60.8 123.04,61.06 51.839,61.938 167.74,62.789 134.34,63.6 131.949,64.039 167.75,64.789 135.53,65.761 138.2,66.94 136.839,69.42 131.949,69.539 51.69,70.039 61.839,70.848 53.839,71.008 151.889,79.66 84.589,80.298 149.79,82.789 109.339,84.148 101.089,86.728 94.91,86.789 130.589,88.458 104.62,90.289 129.072,90.53 104.589,97.658 129.522,97.81 93.86,99.788 107.28,99.789 93.94,104.289 95.91,106.539 98.46,106.539 121.139,106.539 118.339,107.43
GPSRXD: U3.82 U503.21 | length 82.9
  Top Layer w0.2: U503.21@90.39,26.694 90.39,28.036 cw(c92.814,28.036) v1@90.914,29.541 ; v1@96.238,69.34 96.43,68.49 ; 98.084,67.7 124.822,67.7 ccw(c124.822,68.758) 125.57,68.01 cw(c127.051,66.529) 127.051,68.624 U3.82@129.656,68.624
  Top Layer w0.254: v1(96.07,69.23) ccw(c96.915,69.23) 96.317,68.633 96.66,68.29 ccw(c98.084,69.714) 98.084,67.7
  Bottom Layer w0.2: v1@90.77,29.35 ccw(c89.804,30.316) 91.17,30.316 91.17,64.58 cw(c94.236,64.58) 92.068,66.748 94.403,69.083 cw(c94.758,68.727) 94.758,69.23 v1(96.07,69.23) ; v1@96.048,69.031 95.17,69.23 v1@96.048,69.429
  other v1: 90.94,29.52
GPSTXD: R500.2 U3.85 U503.20 | length 83.9
  Top Layer w0.2: v1@95.38,68.05 96.1,68.1 v1@95.506,68.424 ; v1(95.393,68.256) cw(c95.393,66.563) 96.59,67.76 ccw(c98.126,69.296) 98.126,67.124 U3.85@129.656,67.124
  Top Layer w0.5: U503.20@91.49,26.694 91.49,27.84 cw(c94.556,27.84) 92.388,30.008 ccw(c92.205,30.191) 92.464,30.191 R500.2@92.464,30.381
  Bottom Layer w0.2: v1@91.711,29.442 91.91,30.32 v1@92.109,29.442 ; v1(91.91,29.42) 91.91,64.14 cw(c94.976,64.14) 92.808,66.308 93.875,67.375 94.546,68.046 cw(c95.052,67.539) 95.052,68.256 ; v1@95.335,68.064 94.87,68.23 ; v1@95.335,68.447 94.87,68.23 ; 94.87,68.23 v1(95.393,68.256) 94.87,68.23
GPSTXDOUT: J201.10 Q501.3 | length 64.5
  Top Layer w0.3: J201.10@62.327,8.964 62.873,8.418 ccw(c65.041,10.586) 65.041,7.52 v1(74.71,7.52) ; v1(77.37,33.55) 77.482,33.662 cw(c79.65,31.494) 79.65,34.56 80.48,34.56 ccw(c80.48,37.626) 82.648,35.458 83.642,36.452 cw(c85.81,34.284) 85.81,37.35 94.936,37.35 cw(c94.936,35.336) 96.36,36.76 cw(c94.356,34.756) 97.19,34.756 Q501.3@97.19,32.509
  Bottom Layer w0.3: v1(74.71,7.52) 75.402,8.212 ccw(c73.234,10.38) 76.3,10.38 76.3,31.21 cw(c79.366,31.21) 77.198,33.378 v1(77.37,33.55)
GSMSTATUS: pad.46 U501.12 | length 2.9
  Top Layer w0.3: U501.12@131.11,36.598 pad.46@131.11,39.52
GSPK2+: C520.1 U501.8 | length 8.6
  Top Layer w0.5: U501.8@134.41,29.198 135.43,29.198 cw(c135.43,26.27) 137.5,28.34 139.606,26.234 ccw(c139.742,26.369) C520.1@139.742,26.178 138.203,27.637
GSPK2-: C522.1 U501.9 | length 6
  Top Layer w0.5: U501.9@134.41,30.298 135.732,30.298 cw(c135.732,27.232) 137.9,29.4 138.685,28.615 ccw(c139.742,29.673) C522.1@139.742,28.178
GSPK+: C511.2 C512.1 D500.4 J503.8 U501.7 | length 43.1
  Top Layer w0.3: C511.2@143.261,24.222 143.261,24.558 cw(c143.632,24.558) 143.37,24.82 cw(c144.384,23.806) 144.384,25.24 146.65,25.24 cw(c146.65,22.174) 148.818,24.342 154.062,19.098 cw(c151.894,16.93) 154.96,16.93 154.96,11.267 cw(c151.894,11.267) 154.062,9.099 J503.8@153.827,8.864 ; D500.4@153.412,12.854 154.85,12.854 ccw(c154.85,13.01) 154.96,12.9
  Top Layer w0.5: U501.7@134.41,28.098 135.303,28.098 cw(c135.303,25.443) 137.18,27.32 138.11,26.39 cw(c136.829,25.11) 138.64,25.11 ccw(c139.582,25.11) 138.916,24.444 ccw(c140.089,25.617) 140.089,23.958 ; 142.541,24.127 C512.1@140.578,23.958 ; 140.089,23.958 C512.1@140.578,23.958 ; 140.089,23.958 142.624,23.958 ; C512.1@140.578,23.958 141.262,23.958 C511.2@143.261,24.222 ; 142.624,23.958 ccw(c142.624,24.86) C511.2@143.261,24.222 ; 142.624,23.958 C511.2@143.261,24.222
GSPK-: C512.2 C513.1 D500.6 J503.7 U501.6 | length 39.2
  Top Layer w0.3: C513.1@143.342,22.278 143.342,22.569 cw(c143.951,22.569) 143.52,23 cw(c144.293,22.227) 144.293,23.32 146.46,23.32 cw(c146.46,20.254) 148.628,22.422 150.657,20.393 cw(c150.606,20.342) 150.678,20.342 151.462,19.558 cw(c149.294,17.39) 152.36,17.39 152.36,8.601 ccw(c155.426,8.601) 153.258,6.433 J503.7@153.827,5.864 ; 152.36,14.78 ccw(c152.41,14.83) 152.41,14.759 D500.6@153.412,14.759
  Top Layer w0.5: U501.6@134.41,26.998 134.846,26.998 cw(c134.846,24.206) 136.82,26.18 136.906,26.094 cw(c134.772,23.96) 137.79,23.96 ccw(c138.901,23.96) 138.115,23.175 ccw(c140.281,25.341) 140.281,22.278 C513.1@143.342,22.278 ; C512.2@140.578,22.561 142.559,22.278
INTWAKE: pad.14@152.4,86.18 R3.2 U3.47 U9.11 | length 56.4
  Top Layer w0.2: U9.11@130.648,90.526 v1@132.84,90.526 ; v1@132.817,90.729 131.94,90.526 ; v1@132.819,90.331 131.94,90.526 ; v1(132.84,90.53) 131.94,90.526 ; U3.47@145.776,70.124 150.725,70.124 ccw(c150.725,72.365) 152.31,70.78 ccw(c151.03,72.06) 152.84,72.06 152.84,84.715 ccw(c149.713,84.715) 151.924,86.926 ; v1(149.44,89.41) 151.924,86.926
  Top Layer w0.5: R3.2@148.123,89.764 148.586,89.764 cw(c148.586,88.556) v1(149.44,89.41)
  Bottom Layer w0.254: v1(132.84,90.53) 136.338,90.53 cw(c136.338,89.028) 137.4,90.09 ccw(c137.931,90.621) 137.931,89.87 149.8,89.87 cw(c149.8,86.804) 151.968,88.972 152.34,88.6 ; v1@132.854,90.358 133.902,90.53 v1@132.854,90.702 ; 148.4,89.87 cw(c148.4,88.47) v1@149.39,89.46
KEY1: J401.13 R416.2 | length 14
  Top Layer w0.2: R416.2@85.053,105.837 85.053,100.857 ccw(c88.119,100.857) 85.951,98.689 87.203,97.437 cw(c85.035,95.269) 88.101,95.269 J401.13@88.101,92.87
KEY2: J401.12 R415.2 R416.1 | length 17.4
  Top Layer w0.2: R416.1@85.053,107.234 cw(c85.053,106.404) 85.639,106.991 86.255,106.375 cw(c84.087,104.207) 87.153,104.207 ; R415.2@87.153,105.837 87.153,99.867 ccw(c90.219,99.867) 88.051,97.699 88.203,97.547 cw(c86.035,95.379) 89.101,95.379 J401.12@89.101,92.87
KEY3: J401.11 R414.2 R415.1 | length 16.6
  Top Layer w0.2: R415.1@87.153,107.234 cw(c87.153,106.259) 87.694,107.069 cw(c87.153,106.259) 87.842,106.948 87.866,106.924 ; 87.866,106.924 cw(c86.818,105.876) 88.3,105.876 ; R414.2@89.453,105.837 88.396,105.837 cw(c88.396,105.972) 88.3,105.876 ; J401.11@90.101,92.87 90.101,95.659 ccw(c87.035,95.659) 89.203,97.827 89.198,97.832 cw(c91.366,100) 88.3,100 88.3,105.876
KEY4: J401.9 R413.2 R414.1 | length 17.5
  Top Layer w0.2: R414.1@89.453,107.234 89.828,107.234 cw(c89.828,106.538) 90.32,107.03 cw(c89.741,106.451) 90.56,106.451 90.56,105.92 cw(c88.914,105.92) 90.078,104.756 ccw(c92.246,102.588) 89.18,102.588 89.18,101.208 ccw(c92.246,101.208) 90.078,99.04 91.323,97.795 cw(c89.446,95.918) 92.101,95.918 J401.9@92.101,92.87 ; 90.568,105.837 R413.2@91.553,105.837
LCM_BL: R404.2 R410.2 U3.78 | length 89.2
  Top Layer w0.2: v1(96.43,71.24) 98.444,71.24 cw(c98.444,69.56) 99.632,70.748 ccw(c101.8,72.916) 101.8,69.85 123.848,69.85 ccw(c123.848,70.772) 124.5,70.12 cw(c125.716,68.904) 125.716,70.624 U3.78@129.656,70.624 ; v1@96.452,71.041 97.33,71.24 v1@96.452,71.439
  Top Layer w0.3: R410.2@116.812,107.107 ccw(c117.085,107.107) R410.2@116.892,106.914
  Top Layer w0.5: R410.2@116.812,107.107 R404.2@116.812,109.018
  Bottom Layer w0.2: v1@96.231,71.262 96.43,72.14 v1@96.629,71.262 ; v1(96.43,71.24) 96.43,85.571 cw(c99.496,85.571) 97.328,87.739 ccw(c95.298,89.769) 98.169,89.769 98.169,96.569 cw(c101.235,96.569) 99.067,98.737 106.524,106.194 cw(c108.735,103.983) 108.735,107.11 114.932,107.11 ccw(c114.932,109.807) v1(116.839,107.9) v1@116.745,107.806
MBCTS: R518.2 U3.73 | length 66.5
  Top Layer w0.2: v1(118.53,71.04) 118.772,71.282 cw(c120.94,69.114) 120.94,72.18 132.109,72.18 ccw(c132.109,72.931) 132.64,72.4 ccw(c132.143,72.897) 132.846,72.897 U3.73@132.846,73.684
  Top Layer w0.254: v1(105.31,32.11) 106.376,31.044 ccw(c108.544,33.212) 108.544,30.146 R518.2@109.497,30.146
  Bottom Layer w0.2: v1(105.31,32.11) 105.31,37.59 ccw(c102.244,37.59) 104.412,39.758 104.038,40.132 cw(c106.206,42.3) 103.14,42.3 103.14,54.38 cw(c106.206,54.38) 104.038,56.548 v1(118.53,71.04)
MBDTR: R521.2 U3.68 | length 74.2
  Top Layer w0.2: v1(114.43,72.4) 118.382,76.352 cw(c120.55,74.184) 120.55,77.25 132.972,77.25 cw(c132.972,74.382) 134.797,76.594 cw(c132.972,74.382) 135,76.41 cw(c134.165,75.575) 135.346,75.575 U3.68@135.346,73.684
  Top Layer w0.254: v1(103.08,37.44) 103.376,37.144 ccw(c105.544,39.312) 105.544,36.246 R521.2@109.497,36.246
  Bottom Layer w0.2: v1(103.08,37.44) 100.878,39.642 cw(c103.046,41.81) 99.98,41.81 99.98,56.68 cw(c103.046,56.68) 100.878,58.848 v1(114.43,72.4)
MBPWRKEY: R502.2 U3.70 | length 106.8
  Top Layer w0.2: v1(100.79,51.45) 101.092,51.148 ccw(c103.26,53.316) 103.26,50.25 v1(128.5,50.25) ; v1(115.99,71.57) 119.272,74.852 cw(c121.44,72.684) 121.44,75.75 133.018,75.75 cw(c133.018,74.418) 133.96,75.36 cw(c133.028,74.428) 134.346,74.428 U3.70@134.346,73.684 ; v1(144.46,33.12) cw(c143.632,32.292) 144.803,32.292 R502.2@144.803,32.054
  Bottom Layer w0.2: v1(100.79,51.45) 100.79,55.1 cw(c103.856,55.1) 101.688,57.268 v1(115.99,71.57) ; v1(128.5,50.25) 130.582,48.168 cw(c128.414,46) 131.372,46.805 cw(c128.414,46) 131.48,46 131.48,45.87 ccw(c134.546,45.87) 132.378,43.702 135.172,40.908 cw(c133.004,38.74) 136.07,38.74 136.07,36.51 ccw(c139.136,36.51) 136.968,34.342 137.292,34.018 ccw(c139.46,36.186) 139.46,33.12 v1(144.46,33.12) ; 138.2,33.12 139.45,33.12 ; v1@144.438,32.921 143.56,33.12 v1@144.438,33.319
MBRING: R516.2 U3.67 | length 86.4
  Top Layer w0.2: v1(114.43,73.37) 116.503,75.443 118.072,77.012 cw(c120.24,74.844) 120.24,77.91 133.782,77.91 cw(c133.782,76.032) 135.11,77.36 cw(c133.333,75.583) 135.846,75.583 U3.67@135.846,73.684
  Top Layer w0.5: v1(103.119,28.29) ccw(c104.978,28.29) 103.663,26.976 ccw(c105.666,28.978) 105.666,26.146 R516.2@109.497,26.146
  Bottom Layer w0.2: v1(103.119,28.29) 103.119,34.691 ccw(c100.053,34.691) 102.221,36.859 100.308,38.772 cw(c102.476,40.94) 99.41,40.94 99.41,57.08 cw(c102.476,57.08) 100.308,59.248 v1(114.43,73.37)
MBRTS: R517.2 U3.66 | length 86.5
  Top Layer w0.2: v1(114.38,74.29) 117.742,77.652 cw(c119.91,75.484) 119.91,78.55 133.908,78.55 cw(c133.908,76.372) 135.448,77.912 cw(c133.28,75.744) 136.346,75.744 U3.66@136.346,73.684
  Top Layer w0.5: v1(102.399,30.64) 103.995,29.044 ccw(c106.163,31.212) 106.163,28.146 R517.2@109.497,28.146
  Bottom Layer w0.2: v1(102.399,30.64) 102.399,34.43 ccw(c99.333,34.43) 101.501,36.598 99.758,38.341 cw(c101.854,40.436) 98.89,40.436 98.89,57.53 cw(c101.956,57.53) 99.788,59.698 v1(114.38,74.29)
MBRXD: pad.37 R520.2 U3.74 | length 66.7
  Top Layer w0.2: v1(117.24,71.76) 119.652,74.172 cw(c121.82,72.004) 121.82,75.07 132.027,75.07 cw(c132.027,74.797) 132.22,74.99 cw(c131.916,74.686) 132.346,74.686 U3.74@132.346,73.684
  Top Layer w0.254: v1(103.99,35.86) 104.706,35.144 ccw(c106.874,37.312) 106.874,34.246 R520.2@109.497,34.246
  Bottom Layer w0.2: v1(103.99,35.86) 103.99,36.72 ccw(c100.924,36.72) 103.092,38.888 102.388,39.592 cw(c104.556,41.76) 101.49,41.76 101.49,54.74 cw(c104.556,54.74) 102.388,56.908 v1(117.24,71.76)
MBTXD: pad.38 R519.2 U3.75 | length 66.8
  Top Layer w0.2: v1(117.5,70.99) 119.295,72.785 cw(c121.464,70.617) 121.464,73.684 U3.75@131.846,73.684
  Top Layer w0.254: v1(104.7,33.64) 105.196,33.144 ccw(c107.364,35.312) 107.364,32.246 R519.2@109.497,32.246
  Top Layer w0.5: pad.38@107.68,32.17 R519.2@109.497,32.246
  Bottom Layer w0.2: v1(104.7,33.64) ccw(c104.652,33.688) 104.72,33.688 104.72,36.95 ccw(c101.654,36.95) 103.822,39.118 103.008,39.932 cw(c105.176,42.1) 102.11,42.1 102.11,54.33 cw(c105.176,54.33) 103.008,56.498 v1(117.5,70.99)
MC-A: J400.6 U400.3 | length 21.9
  Top Layer w0.5: J400.6@41.4,71.6 41.4,70.39 cw(c38.334,70.39) 40.502,68.222 39.678,67.398 ccw(c41.846,65.23) 38.78,65.23 38.78,63.93 ccw(c41.846,63.93) 39.678,61.762 39.81,61.63 ccw(c41.452,63.272) 41.452,60.95 42.519,60.95 cw(c42.519,59.789) 43.34,60.61 cw(c43.209,60.479) 43.394,60.479 U400.3@43.394,59.093
  Bottom Layer w0.254: 39.31,76.04 39.31,74.4 ccw(c42.376,74.4) 40.208,72.232 40.432,72.008 ccw(c41.394,72.969) J400.6@41.394,71.609
MC-B: J400.4 U400.12 | length 14.3
  Top Layer w0.5: U400.12@43.394,64.808 ccw(c43.381,64.821) 43.4,64.821 J400.4@43.4,71.6
  Bottom Layer w0.254: 43.39,79.13 cw(c43.381,79.121) 43.394,79.121 J400.4@43.394,71.609
MC-NA: J400.7 U400.5 | length 35.2
  Top Layer w0.5: J400.7@40.4,73.972 40.4,73.6 cw(c41.969,73.6) 40.86,74.71 cw(c41.633,73.936) 41.633,75.03 46.32,75.03 cw(c46.32,72.06) 48.42,74.16 cw(c47.14,72.88) 48.95,72.88 48.95,64.662 cw(c46.048,64.662) 48.1,62.61 cw(c46.579,64.131) 46.579,61.98 ccw(c46.579,60.968) 45.864,61.684 ccw(c46.997,60.551) 45.394,60.551 U400.5@45.394,59.093 ; U400.5@45.394,59.716 cw(c47.974,59.716) 46.15,61.54 cw(c47.14,60.55) 47.14,61.95
  Bottom Layer w0.254: J400.7@40.394,73.609 40.394,79.055 cw(c40.415,79.055) 40.4,79.07
MC-NB: J400.5 U400.10 | length 12.8
  Top Layer w0.5: J400.5@42.4,73.6 42.937,73.063 ccw(c43.5,73.627) 43.196,72.89 ccw(c43.5,73.627) 43.5,72.83 ; 43.21,72.89 cw(c43.21,71.876) 43.927,72.593 ; 43.93,72.59 cw(c42.771,71.431) 44.41,71.431 44.41,69.507 ccw(c45.537,69.507) 44.74,68.71 cw(c43.16,67.13) 45.394,67.13 U400.10@45.394,64.808
  Bottom Layer w0.254: J400.5@42.394,73.609 42.394,76.021 cw(c42.449,76.021) 42.41,76.06